# EAGLE board ATM8_mainboard (EAGLE 6.4)

Size 114.28 x 60.63 mm. Coordinates in mm from the lower left corner, seen from the top.
Outline: 0,0 114.28,0 114.28,60.63 0,60.63 0,0
Copper layers (1*16): Top 0.035mm / dielectric 1.5mm / Bottom 0.035mm
Design rules "default": minimum track width 10mil, minimum drill 24mil, track to track 8mil, track to pad 8mil, pad to pad 8mil, via to via 8mil, smd to smd 8mil, copper to edge 40mil, drill to drill 8mil, minimum pad ring 10mil, minimum via ring 8mil, stop-mask expansion 4mil, vias tented up to drill 0mil, thermal gap 10mil

## Footprints (pad centres in the part's own frame; a part is rotated, then mirrored left to right if it is on the bottom)
MA05-1 = drill 1.016 long: 1 -5.08,0; 2 -2.54,0; 3 0,0; 4 2.54,0; 5 5.08,0
C025-024X044 = drill 0.813 octagon: 1 -1.27,0; 2 1.27,0
MA04-1 = drill 1.016 long: 1 -3.81,0; 2 -1.27,0; 3 1.27,0; 4 3.81,0
JP1 = drill 0.914 long: 1 0,-1.27; 2 0,1.27
DIL28-3 = drill 0.813 long: 1 -16.51,-3.81; 2 -13.97,-3.81; 3 -11.43,-3.81; 4 -8.89,-3.81; 5 -6.35,-3.81; 6 -3.81,-3.81; 7 -1.27,-3.81; 8 1.27,-3.81; 9 3.81,-3.81; 10 6.35,-3.81; 11 8.89,-3.81; 12 11.43,-3.81; 13 13.97,-3.81; 14 16.51,-3.81; 15 16.51,3.81; 16 13.97,3.81; 17 11.43,3.81; 18 8.89,3.81; 19 6.35,3.81; 20 3.81,3.81; 21 1.27,3.81; 22 -1.27,3.81; 23 -3.81,3.81; 24 -6.35,3.81; 25 -8.89,3.81; 26 -11.43,3.81; 27 -13.97,3.81; 28 -16.51,3.81
MA03-2 = drill 1.016: 1 -2.54,-1.27 | drill 1.016 octagon: 2 -2.54,1.27; 3 0,-1.27; 4 0,1.27; 5 2.54,-1.27; 6 2.54,1.27
6410-02 = drill 1.016 long: 1 1.27,0; 2 -1.27,0
MA07-1 = drill 1.016 long: 1 -7.62,0; 2 -5.08,0; 3 -2.54,0; 4 0,0; 5 2.54,0; 6 5.08,0; 7 7.62,0
HC49/S = drill 0.813: 1 -2.413,0; 2 2.413,0
0207/7 = drill 0.813 octagon: 1 -3.81,0; 2 3.81,0
0207/10 = drill 0.813 octagon: 1 -5.08,0; 2 5.08,0
MA03-1 = drill 1.016 long: 1 -2.54,0; 2 0,0; 3 2.54,0

## Placement (x,y rotation side)
4BITOT1  FEMALE  [MA05-1]  30.48,38.1 180 top
4BITOT2  FEMALE  [MA05-1]  45.72,38.1 180 top
C1  22p  [C025-024X044]  88.9,19.05 0 top
C2  22p  [C025-024X044]  91.44,15.24 180 top
C3  22p  [C025-024X044]  36.83,19.05 0 top
C4  22p  [C025-024X044]  39.37,15.24 180 top
DISP_1  MALE  [MA04-1]  69.85,35.56 180 top
DISP_2  MALE  [MA04-1]  17.78,38.1 180 top
FREE1  FEMALE  [MA05-1]  77.47,40.64 180 top
FREE2  MALE  [JP1]  27.94,15.24 270 top
IC1_POSUV  MEGA8-P  [DIL28-3]  86.36,26.67 0 top
IC2_VRETENO  MEGA8-P  [DIL28-3]  34.29,27.94 0 top
INPUTCNC  FEMALE  [MA05-1]  74.93,53.34 90 top
ISP  MALE  [MA03-2]  95.25,39.37 270 top
ISP1  MALE  [MA03-2]  45.72,44.45 180 top
J1  22-27-2021-02  [6410-02]  85.09,13.97 0 top
J2  22-27-2021-02  [6410-02]  34.29,12.7 0 top
LPT1  FEMALE  [MA07-1]  72.39,6.35 180 top
LPT2  FEMALE  [MA07-1]  55.88,45.72 270 top
Q1  [HC49/S]  91.44,26.67 180 top
Q2  [HC49/S]  39.37,27.94 180 top
R1  10k  [0207/7]  66.04,19.05 0 top
R2  10k  [0207/7]  13.97,21.59 0 top
R3  4.7k  [0207/10]  66.04,26.67 90 top
R4  4.7k  [0207/10]  62.23,26.67 90 top
R5  4.7k  [0207/10]  12.7,29.21 90 top
R6  4.7k  [0207/10]  8.89,29.21 90 top
R7  270R  [0207/10]  53.34,7.62 0 top
R8  270R  [0207/10]  80.01,15.24 270 top
R9  270R  [0207/10]  77.47,15.24 270 top
R10  [0207/10]  74.93,15.24 270 top
R11  270R  [0207/10]  72.39,15.24 270 top
R12  270R  [0207/10]  55.88,11.43 0 top
R13  270R  [0207/10]  50.8,21.59 180 top
R14  270R  [0207/10]  59.69,53.34 90 top
R15  270R  [0207/10]  62.23,49.53 90 top
R16  270R  [0207/10]  64.77,46.99 90 top
R17  270R  [0207/10]  67.31,44.45 90 top
R18  270R  [0207/10]  69.85,43.18 90 top
SV1  FEMALE  [MA03-1]  20.32,17.78 180 top
SV2  FEMALE  [MA03-1]  27.94,44.45 180 top
SV4  FEMALE  [MA04-1]  96.52,11.43 0 top
XPM  FEMALE  [MA03-1]  102.87,41.91 0 top
ZPM  FEMALE  [MA03-1]  102.87,36.83 180 top

## Library data of the parts
4BITOT1 4BITOT2 DISP_1 DISP_2 FREE1 INPUTCNC ISP ISP1 LPT1 LPT2 SV1 SV2 SV4 XPM ZPM = con-lstb; OC_FARNELL: unknown; OC_NEWARK: unknown
C1-C4 R1-R18 = resistor
FREE2 = jumper
IC1_POSUV IC2_VRETENO = atmel; OC_FARNELL: unknown; OC_NEWARK: unknown
J1 J2 = con-molex; OC_FARNELL: unknown; OC_NEWARK: unknown
Q1 Q2 = crystal; OC_FARNELL: 1667008; OC_NEWARK: unknown

## Nets
+Z: IC1_POSUV.16 ZPM.3
-Z: IC1_POSUV.15 ZPM.2
AVCC: IC1_POSUV.20 IC2_VRETENO.20
DIRVRET: IC2_VRETENO.12 R13.2
DIRX: IC1_POSUV.2 R11.1
DIRZ: IC1_POSUV.4 R9.1
DORX: INPUTCNC.4 R15.2
DORZ: INPUTCNC.5 R14.2
ENABLE: IC1_POSUV.14 IC2_VRETENO.13 R7.1
G: INPUTCNC.1 R18.2
GND: 4BITOT1.5 4BITOT2.1 C1.2 C2.2 C3.2 C4.2 DISP_1.1 DISP_2.1 IC1_POSUV.8 IC1_POSUV.22 IC2_VRETENO.8 IC2_VRETENO.22 ISP1.6 ISP.6 J1.2 J2.2 LPT1.7 LPT2.1 SV1.3 SV2.1 XPM.3 ZPM.1
I: INPUTCNC.3 R16.2
M01: IC2_VRETENO.2 SV1.2
M02: IC2_VRETENO.3 SV1.1
M03: IC2_VRETENO.4
MISO1: IC1_POSUV.18 ISP.1 XPM.1
MISO2: 4BITOT2.5 IC2_VRETENO.18 ISP1.1
MO3: SV2.3
MOSI1: IC1_POSUV.17 ISP.4 XPM.2
MOSI2: 4BITOT2.4 IC2_VRETENO.17 ISP1.4
N$1: LPT1.6 R12.2
N$2: LPT1.5 R11.2
N$3: LPT1.4 R10.2
N$4: LPT1.3 R9.2
N$5: LPT1.2 R8.2
N$6: LPT1.1 R7.2
N$7: LPT2.7 R18.1
N$8: LPT2.6 R17.1
N$9: LPT2.5 R16.1
N$10: LPT2.4 R15.1
N$11: LPT2.3 R14.1
N$12: LPT2.2 R13.1
PB3: C3.1 IC2_VRETENO.9 Q2.2
PB4: C4.1 IC2_VRETENO.10 Q2.1
PB6: C1.1 IC1_POSUV.9 Q1.2
PB7: C2.1 IC1_POSUV.10 Q1.1
PB12: 4BITOT2.2 IC2_VRETENO.15
PB22: 4BITOT2.3 IC2_VRETENO.16
PC01: FREE1.1 IC1_POSUV.23
PC02: 4BITOT1.2 IC2_VRETENO.23
PC11: FREE1.2 IC1_POSUV.24
PC12: 4BITOT1.3 IC2_VRETENO.24
PC21: FREE1.3 IC1_POSUV.25
PC22: 4BITOT1.4 IC2_VRETENO.25
PC31: FREE1.4 IC1_POSUV.26
PC32: IC2_VRETENO.26
PD41: IC1_POSUV.6 SV4.1
PD42: FREE2.1 IC2_VRETENO.6
PD51: IC1_POSUV.11 SV4.2
PD52: FREE2.2 IC2_VRETENO.11
PD61: IC1_POSUV.12 SV4.3
PD71: IC1_POSUV.13 SV4.4
PWMV: IC2_VRETENO.14 R12.1
RESET1: IC1_POSUV.1 ISP.5 R1.2
RESET2: IC2_VRETENO.1 ISP1.5 R2.2
SCK1: FREE1.5 IC1_POSUV.19 ISP.3
SCK2: 4BITOT1.1 IC2_VRETENO.19 ISP1.3
SCL1: DISP_1.4 IC1_POSUV.28 R4.2
SCL2: DISP_2.4 IC2_VRETENO.28 R6.2
SDA1: DISP_1.3 IC1_POSUV.27 R3.2
SDA2: DISP_2.3 IC2_VRETENO.27 R5.2
STEPX: IC1_POSUV.3 R10.1
STEPZ: IC1_POSUV.5 R8.1
V: INPUTCNC.2 R17.2
VCC: DISP_1.2 DISP_2.2 IC1_POSUV.7 IC2_VRETENO.7 ISP1.2 ISP.2 J1.1 J2.1 R1.1 R2.1 R3.1 R4.1 R5.1 R6.1
ZMM: IC2_VRETENO.5 SV2.2

## Tracks (layer width: path | path; a pad name or v marks a point on that pad's centre or on a via)
+Z  (1 unrouted)
-Z  (1 unrouted)
AVCC  (1 unrouted)
DIRVRET  (1 unrouted)
DIRX  (1 unrouted)
DIRZ  (1 unrouted)
DORX  (1 unrouted)
DORZ  (1 unrouted)
ENABLE  (2 unrouted)
G  (1 unrouted)
GND  (21 unrouted)
I  (1 unrouted)
M01  (1 unrouted)
M02  (1 unrouted)
MISO1  (2 unrouted)
MISO2  (2 unrouted)
MOSI1  (2 unrouted)
MOSI2  (2 unrouted)
N$1  (1 unrouted)
N$2  (1 unrouted)
N$3  (1 unrouted)
N$4  (1 unrouted)
N$5  (1 unrouted)
N$6  (1 unrouted)
N$7  (1 unrouted)
N$8  (1 unrouted)
N$9  (1 unrouted)
N$10  (1 unrouted)
N$11  (1 unrouted)
N$12  (1 unrouted)
PB3  (2 unrouted)
PB4  (2 unrouted)
PB6  (2 unrouted)
PB7  (2 unrouted)
PB12  (1 unrouted)
PB22  (1 unrouted)
PC01  (1 unrouted)
PC02  (1 unrouted)
PC11  (1 unrouted)
PC12  (1 unrouted)
PC21  (1 unrouted)
PC22  (1 unrouted)
PC31  (1 unrouted)
PD41  (1 unrouted)
PD42  (1 unrouted)
PD51  (1 unrouted)
PD52  (1 unrouted)
PD61  (1 unrouted)
PD71  (1 unrouted)
PWMV  (1 unrouted)
RESET1  (2 unrouted)
RESET2  (2 unrouted)
SCK1  (2 unrouted)
SCK2  (2 unrouted)
SCL1  (2 unrouted)
SCL2  (2 unrouted)
SDA1  (2 unrouted)
SDA2  (2 unrouted)
STEPX  (1 unrouted)
STEPZ  (1 unrouted)
V  (1 unrouted)
VCC  (13 unrouted)
ZMM  (1 unrouted)